# EAGLE board Tickler-Brains (EAGLE 7.3.0)
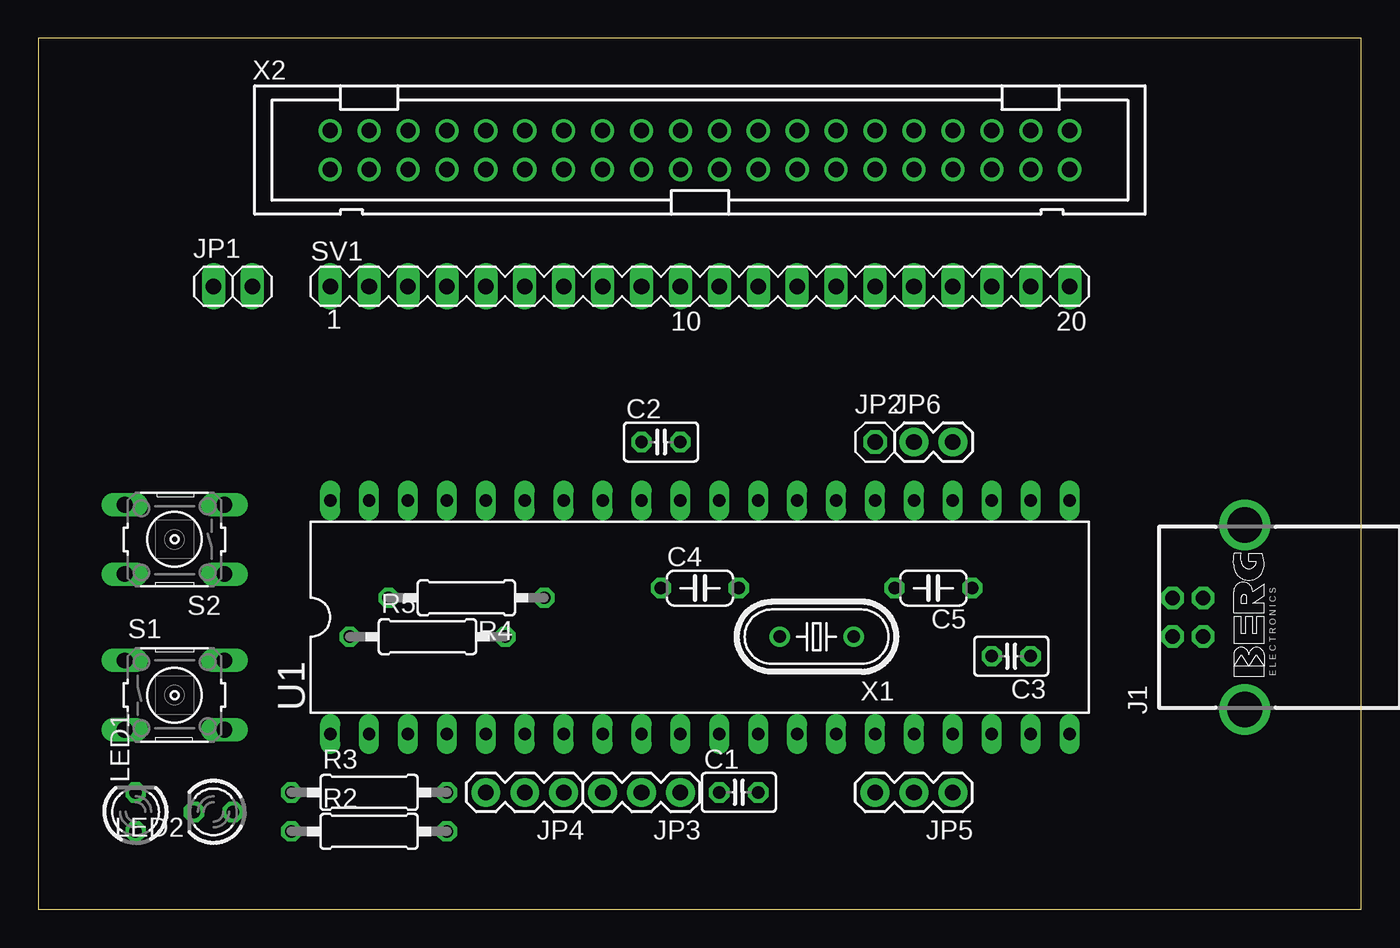
[diagram p0: board, top side]
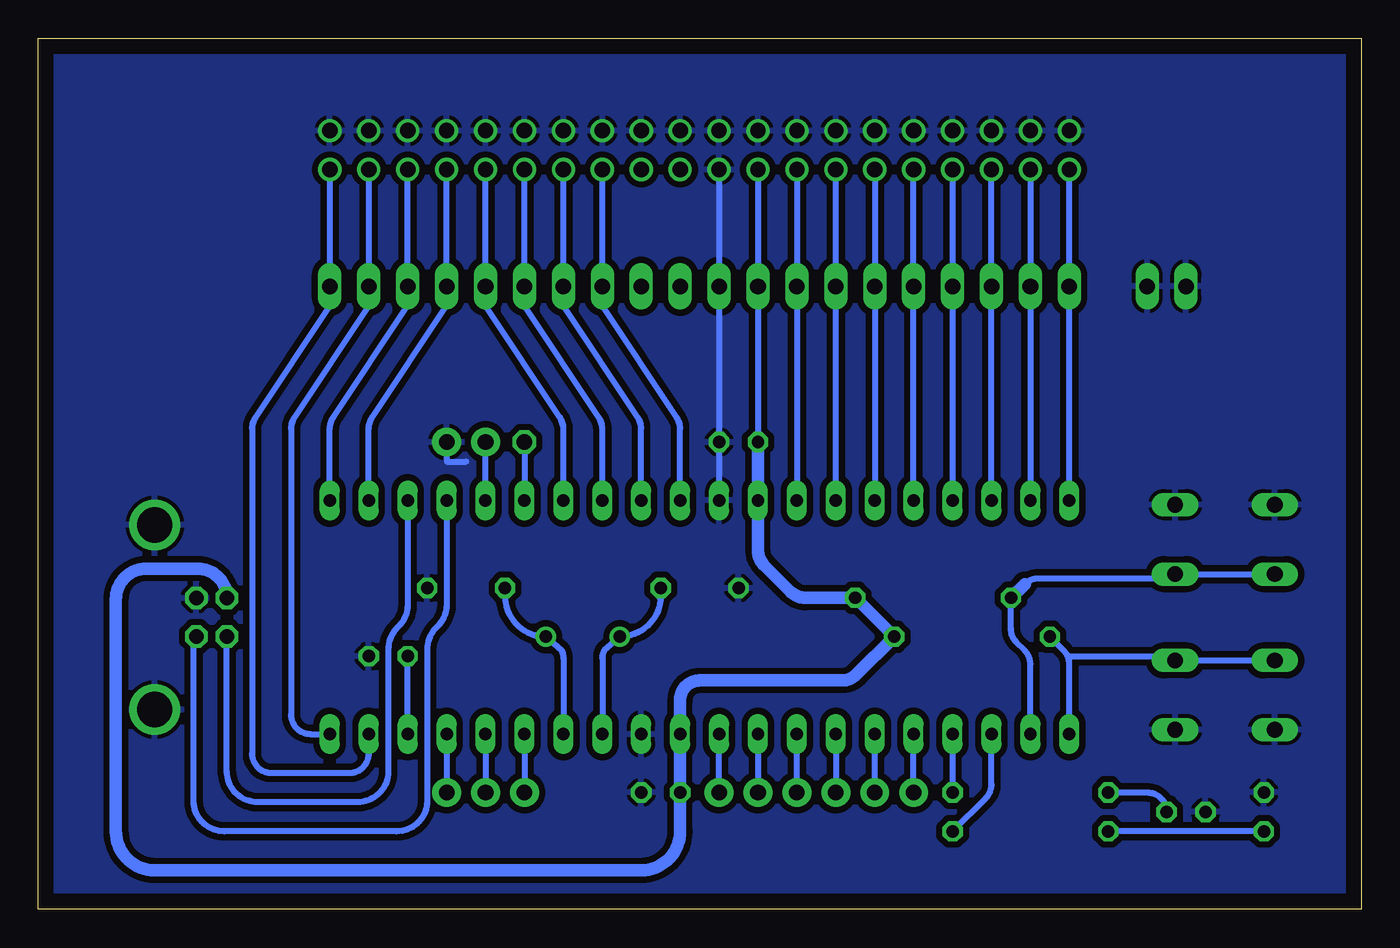
[diagram p1: board, bottom side, seen from below]

Size 86.34 x 56.82 mm. Coordinates in mm from the lower left corner, seen from the top.
Outline: 0,0 86.34,0 86.34,56.82 0,56.82 0,0
Copper layers (1*16): Top 0.035mm / dielectric 1.5mm / Bottom 0.035mm
Design rules "default": minimum track width 10mil, minimum drill 24mil, track to track 8mil, track to pad 8mil, pad to pad 8mil, via to via 8mil, smd to smd 8mil, copper to edge 40mil, drill to drill 8mil, minimum pad ring 10mil, minimum via ring 8mil, stop-mask expansion 4mil, vias tented up to drill 0mil, thermal gap 10mil

## Footprints (pad centres in the part's own frame; a part is rotated, then mirrored left to right if it is on the bottom)
C025-025X050 = drill 0.813 octagon: 1 -1.27,0; 2 1.27,0
C050-024X044 = drill 0.813 octagon: 1 -2.54,0; 2 2.54,0
PN61729-S = drill 0.95 octagon: 1 1.25,4.71; 2 -1.25,4.71; 3 -1.25,2.71; 4 1.25,2.71 | drill 2.3 pad 2.9: S1 -6.02,0; S2 6.02,0
1X02 = drill 1.016 long: 1 -1.27,0; 2 1.27,0
1X01 = drill 1.016 octagon: 1 0,0
1X03 = drill 1.016 pad 1.88: 1 0,0; 2 2.54,0; 3 5.08,0
1X02' = drill 1.016 pad 1.88: 1 0,0; 2 2.54,0
LED3MM = drill 0.813 octagon: A -1.27,0; K 1.27,0
0207/10 = drill 0.813 octagon: 1 -5.08,0; 2 5.08,0
B3F-10XX = drill 1.016 long: 1 -3.251,2.261; 2 3.251,2.261; 3 -3.251,-2.261; 4 3.251,-2.261
MA20-1 = drill 1.016 long: 1 -24.13,0; 2 -21.59,0; 3 -19.05,0; 4 -16.51,0; 5 -13.97,0; 6 -11.43,0; 7 -8.89,0; 8 -6.35,0; 9 -3.81,0; 10 -1.27,0; 11 1.27,0; 12 3.81,0; 13 6.35,0; 14 8.89,0; 15 11.43,0; 16 13.97,0; 17 16.51,0; 18 19.05,0; 19 21.59,0; 20 24.13,0
DIL40 = drill 0.813 long: 1 -24.13,-7.62; 2 -21.59,-7.62; 3 -19.05,-7.62; 4 -16.51,-7.62; 5 -13.97,-7.62; 6 -11.43,-7.62; 7 -8.89,-7.62; 8 -6.35,-7.62; 9 -3.81,-7.62; 10 -1.27,-7.62; 11 1.27,-7.62; 12 3.81,-7.62; 13 6.35,-7.62; 14 8.89,-7.62; 15 11.43,-7.62; 16 13.97,-7.62; 17 16.51,-7.62; 18 19.05,-7.62; 19 21.59,-7.62; 20 24.13,-7.62; 21 24.13,7.62; 22 21.59,7.62; 23 19.05,7.62; 24 16.51,7.62; 25 13.97,7.62; 26 11.43,7.62; 27 8.89,7.62; 28 6.35,7.62; 29 3.81,7.62; 30 1.27,7.62; 31 -1.27,7.62; 32 -3.81,7.62; 33 -6.35,7.62; 34 -8.89,7.62; 35 -11.43,7.62; 36 -13.97,7.62; 37 -16.51,7.62; 38 -19.05,7.62; 39 -21.59,7.62; 40 -24.13,7.62
HC49U-V = drill 0.813: 1 -2.413,0; 2 2.413,0
PAK100/2500-40 = drill 1 pad 1.422: 1 -24.13,-1.27; 2 -24.13,1.27; 3 -21.59,-1.27; 4 -21.59,1.27; 5 -19.05,-1.27; 6 -19.05,1.27; 7 -16.51,-1.27; 8 -16.51,1.27; 9 -13.97,-1.27; 10 -13.97,1.27; 11 -11.43,-1.27; 12 -11.43,1.27; 13 -8.89,-1.27; 14 -8.89,1.27; 15 -6.35,-1.27; 16 -6.35,1.27; 17 -3.81,-1.27; 18 -3.81,1.27; 19 -1.27,-1.27; 20 -1.27,1.27; 21 1.27,-1.27; 22 1.27,1.27; 23 3.81,-1.27; 24 3.81,1.27; 25 6.35,-1.27; 26 6.35,1.27; 27 8.89,-1.27; 28 8.89,1.27; 29 11.43,-1.27; 30 11.43,1.27; 31 13.97,-1.27; 32 13.97,1.27; 33 16.51,-1.27; 34 16.51,1.27; 35 19.05,-1.27; 36 19.05,1.27; 37 21.59,-1.27; 38 21.59,1.27; 39 24.13,-1.27; 40 24.13,1.27

## Placement (x,y rotation side)
C1  100nF  [C025-025X050]  45.72,7.62 0 top
C2  100nF  [C025-025X050]  40.64,30.48 0 top
C3  470nF  [C025-025X050]  63.5,16.51 180 top
C4  15pF  [C050-024X044]  43.18,20.95 0 top
C5  15pF  [C050-024X044]  58.42,20.95 180 top
J1  PN61729-S  [PN61729-S]  78.74,19.05 90 top
JP1  gnd  [1X02]  12.7,40.64 0 top
JP2  trig  [1X01]  54.61,30.48 0 top
JP3  [1X03]  41.91,7.62 180 top
JP4  [1X03]  34.29,7.62 180 top
JP5  [1X03]  59.69,7.62 180 top
JP6  tx  [1X02']  57.15,30.48 0 top
LED1  rdy  [LED3MM]  6.35,6.35 90 top
LED2  att  [LED3MM]  11.43,6.35 180 top
R2  1K  [0207/10]  21.59,5.08 0 top
R3  1K  [0207/10]  21.59,7.62 0 top
R4  10K  [0207/10]  27.94,20.32 180 top
R5  10K  [0207/10]  25.4,17.78 0 top
S1  reset  [B3F-10XX]  8.89,13.97 0 top
S2  usr/boot  [B3F-10XX]  8.89,24.13 180 top
SV1  scope tap  [MA20-1]  43.18,40.64 0 top
U1  PIC18F4550_40  [DIL40]  43.18,19.05 0 top
X1  20Mhz  [HC49U-V]  50.8,17.78 180 top
X2  2540-  [PAK100/2500-40]  43.18,49.53 0 top

## Library data of the parts
C1-C5 R2-R5 = rcl
J1 = con-berg; OC_FARNELL: unknown; OC_NEWARK: unknown
JP1 JP2 = pinhead
JP3-JP6 = SparkFun
LED1 LED2 = led
S1 S2 = switch-omron; MPN: B3F-1000; OC_FARNELL: 176432; OC_NEWARK: 36M3542
SV1 = con-lstb; OC_FARNELL: unknown; OC_NEWARK: unknown
U1 = microchip; MF: MICROCHIP; MPN: PIC18F4550-I/P; OC_FARNELL: 9321357; OC_NEWARK: 74K8623
X1 = crystal; OC_FARNELL: 1666969; OC_NEWARK: unknown
X2 = con-3m; OC_FARNELL: unknown; OC_NEWARK: unknown

## Nets
!RESET: R5.1 S1.1 S1.2 U1.1
!USER: R4.2 S2.1 S2.2 U1.2
+5V: C1.1 C2.1 J1.1 R4.1 R5.2 U1.11 U1.32 X2.17
B0/SDA: U1.33 X2.15
B1/SCL: U1.34 X2.13
B2: U1.35 X2.11
B3: U1.36 X2.9
B4: U1.37 X2.7
B5: U1.38 X2.5
B6: U1.39 X2.3
B7: U1.40 X2.1
D+: J1.3 U1.24
D-: J1.2 U1.23
GND: C1.2 C2.2 C3.1 C4.1 C5.1 J1.4 J1.S1 J1.S2 JP1.1 JP1.2 JP6.2 LED1.K LED2.K S1.3 S1.4 S2.3 S2.4 U1.12 U1.31 X2.2 X2.4 X2.6 X2.8 X2.10 X2.12 X2.14 X2.16 X2.18 X2.19 X2.20 X2.22 X2.24 X2.26 X2.28 X2.30 X2.32 X2.34 X2.36 X2.38 X2.40
LED-ATTACHED: R3.2 U1.4
LED-READY: R2.2 U1.3
N$1: U1.19 X2.39
N$2: LED1.A R2.1
N$3: LED2.A R3.1
N$4: U1.20 X2.37
N$5: U1.30 X2.25
N$6: U1.29 X2.27
N$7: U1.28 X2.29
N$8: U1.27 X2.31
N$9: U1.22 X2.33
N$10: U1.21 X2.35
N$11: C3.2 U1.18
N$12: JP3.1 U1.10
N$13: JP3.2 U1.9
N$14: JP3.3 U1.8
N$15: JP4.1 U1.7
N$16: JP4.2 U1.6
N$17: JP4.3 U1.5
N$18: JP5.1 U1.17
N$19: JP5.2 U1.16
N$20: JP5.3 U1.15
SCOPETRIG: JP2.1 U1.26
TX: JP6.1 U1.25
X1: C4.2 U1.13 X1.2
X2: C5.2 U1.14 X1.1

## Tracks (layer width: path | path; a pad name or v marks a point on that pad's centre or on a via)
!RESET
  Bottom 0.406: S1.1 S1.2 12.14,16.51 19.05,16.51 19.05,15.98 | U1.1 19.05,15.98 | 19.05,15.98 arc-45 19.42,16.88 R5.1
!USER
  Bottom 0.406: S2.2 S2.1 12.42,21.59 21.06,21.59 arc-45 21.96,21.22 | U1.2 21.59,15.98 arc-45 21.96,16.88 22.49,17.41 arc45 22.86,18.31 R4.2
  Bottom 0.813: R4.2 21.96,21.22
+5V
  Bottom 0.406: X2.17 C2.1
  Bottom 0.813: C2.1 U1.32 39.37,23.39 arc-45 39,22.49 37.2,20.69 arc-45 36.3,20.32 R4.1 R5.2 32.97,15.29 arc45 33.86,14.92 43.18,14.92 arc-90 44.45,13.65 U1.11 C1.1 44.45,5.08 arc90 46.99,2.54 78.74,2.54 arc90 81.28,5.08 81.28,20.23 arc90 79.28,22.23 75.95,22.23 arc90 J1.1
B0/SDA
  Bottom 0.406: X2.15 U1.33
B1/SCL
  Bottom 0.406: U1.34 X2.13
B2
  Bottom 0.406: X2.11 U1.35
B3
  Bottom 0.406: U1.36 X2.9
B4
  Bottom 0.406: X2.7 U1.37
B5
  Bottom 0.406: U1.38 X2.5
B6
  Bottom 0.406: X2.3 U1.39
B7
  Bottom 0.406: U1.40 X2.1
D+
  Bottom 0.406: U1.24 59.69,19.88 arc45 60.28,18.46 60.37,18.37 arc-45 60.96,16.95 60.96,7.08 arc90 62.96,5.08 74.2,5.08 arc90 76.2,7.08 76.2,17.63 J1.3
D-
  Bottom 0.406: U1.23 62.23,19.88 arc45 62.82,18.46 62.91,18.37 arc-45 63.5,16.95 63.5,8.98 arc90 65.5,6.99 72.03,6.99 arc90 74.03,8.98 J1.2
GND
  Bottom 0.406: X2.19 U1.31 | JP6.2 59.69,29.21 58.42,29.21
  pour Bottom (isolate 0.406): 0,57.15 86.36,57.15 86.36,0 0,0
LED-ATTACHED
  Bottom 0.406: U1.4 R3.2
LED-READY
  Bottom 0.406: R2.2 24.5,7.25 arc-45 24.13,8.15 U1.3
N$1
  Bottom 0.406: X2.39 67.31,39.37 72.18,32.07 arc-34 72.39,31.36 72.39,10.16 arc-90 71.12,8.89 66.04,8.89 arc-90 64.77,10.16 U1.19
N$2
  Bottom 0.406: LED1.A R2.1
N$3
  Bottom 0.406: R3.1 13.97,7.62 arc90 LED2.A
N$4
  Bottom 0.406: X2.37 64.77,39.37 69.64,32.07 arc-34 69.85,31.36 69.85,12.7 arc-90 68.58,11.43 U1.20
N$5
  Bottom 0.406: U1.30 44.45,31.36 arc-34 44.66,32.07 49.53,39.37 X2.25
N$6
  Bottom 0.406: U1.29 46.99,31.36 arc-34 47.2,32.07 52.07,39.37 X2.27
N$7
  Bottom 0.406: U1.28 49.53,31.36 arc-34 49.74,32.07 54.61,39.37 X2.29
N$8
  Bottom 0.406: U1.27 52.07,31.36 arc-34 52.28,32.07 57.15,39.37 X2.31
N$9
  Bottom 0.406: U1.22 64.77,31.36 arc34 64.56,32.07 59.69,39.37 X2.33
N$10
  Bottom 0.406: U1.21 67.31,31.36 arc34 67.1,32.07 62.23,39.37 X2.35
N$11
  Bottom 0.406: U1.18 C3.2
N$12
  Bottom 0.406: JP3.1 U1.10
N$13
  Bottom 0.406: U1.9 JP3.2
N$14
  Bottom 0.406: JP3.3 U1.8
N$15
  Bottom 0.406: U1.7 JP4.1
N$16
  Bottom 0.406: JP4.2 U1.6
N$17
  Bottom 0.406: JP4.3 U1.5
N$18
  Bottom 0.406: U1.17 JP5.1
N$19
  Bottom 0.406: U1.16 JP5.2
N$20
  Bottom 0.406: U1.15 JP5.3
SCOPETRIG
  Bottom 0.406: JP2.1 U1.26
TX
  Bottom 0.406: U1.25 JP6.1
X1
  Bottom 0.406: U1.13 49.53,16.35 arc25 49.41,16.89 X1.2 arc-90 45.72,20.45 C4.2
X2
  Bottom 0.406: U1.14 52.07,16.35 arc-25 52.19,16.89 X1.1 arc90 55.88,20.45 C5.2

## Text on the board
tDocu: 1